# Altium PCB LacewingPXE_v3p1.PcbDoc (part 1 of 2)
Units mm, origin at the board's own origin, x right, y up, seen from the top; angles counter-clockwise.
Board outline 62.74 x 108.59 mm, 2 copper layers (Top Layer, Bottom Layer); 89 components, 71 nets, 448 pads, 65 vias.
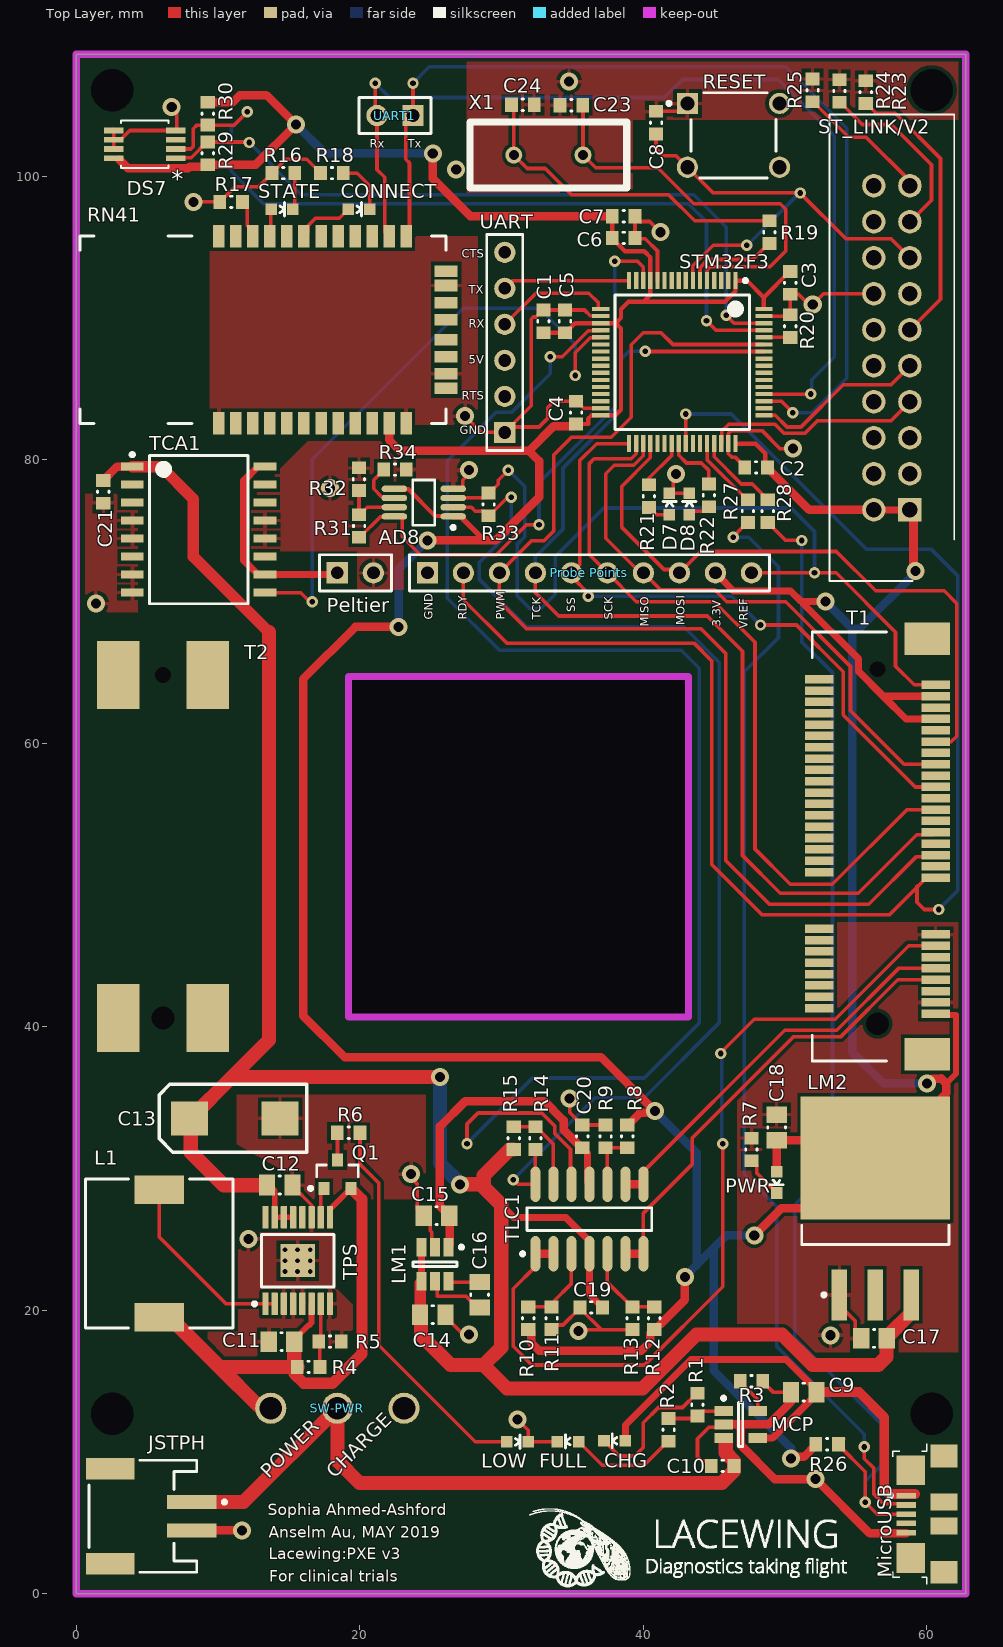
[diagram p0: Top Layer view]
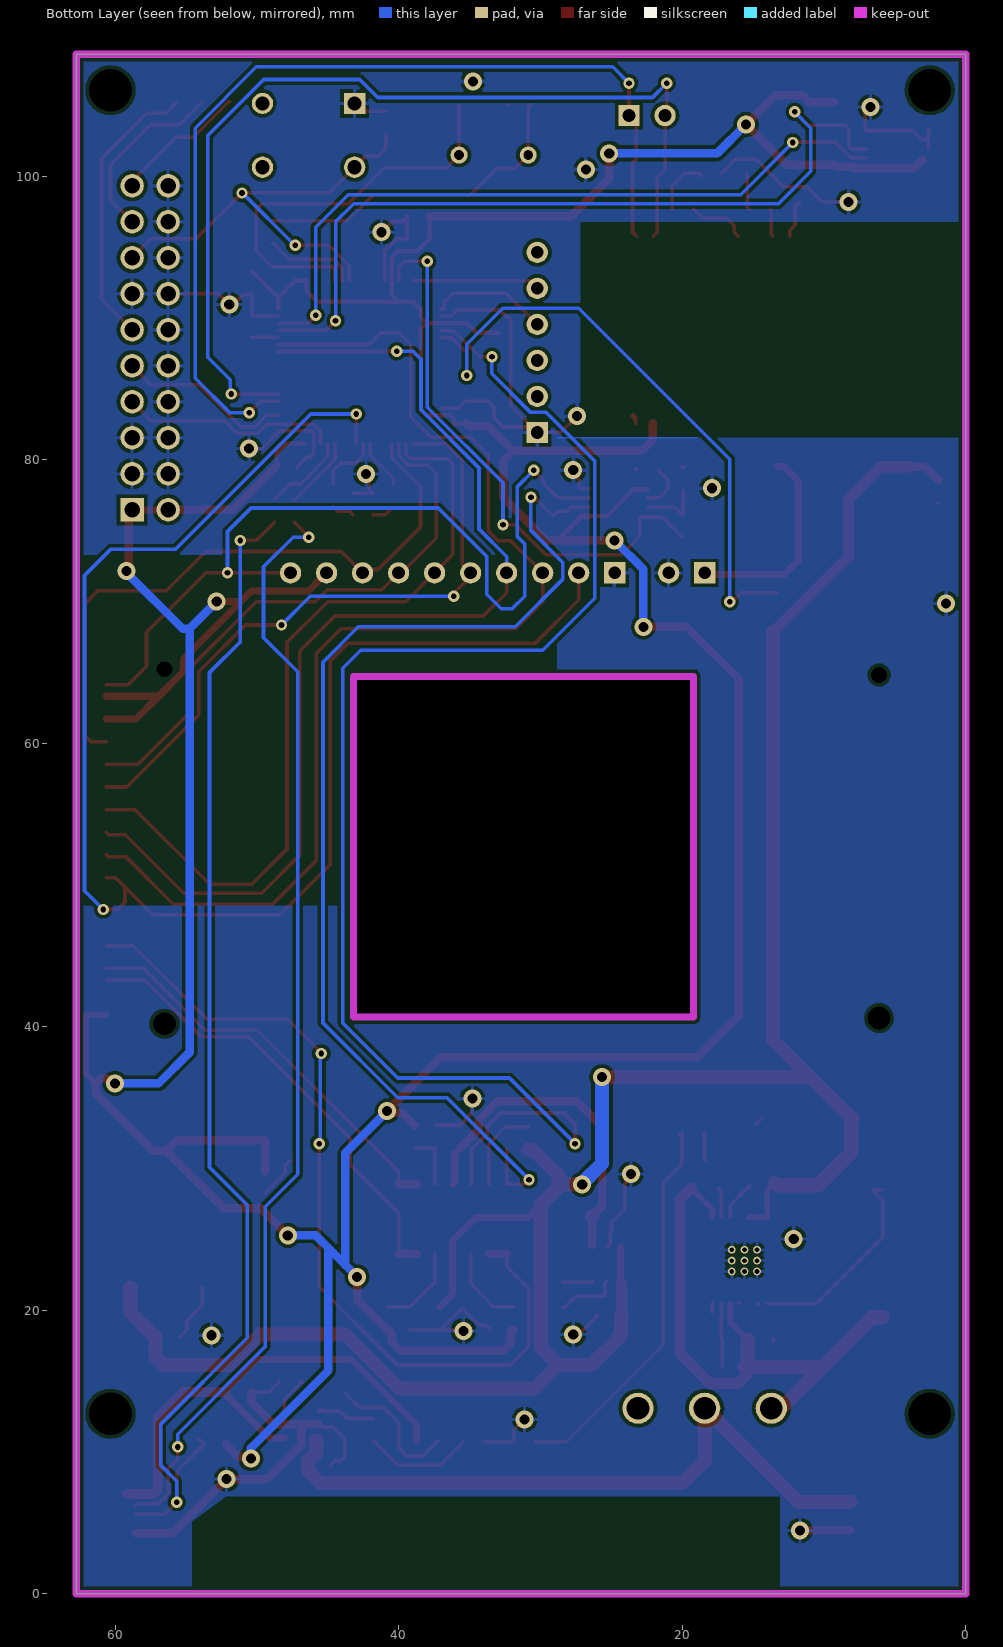
[diagram p1: Bottom Layer view, seen from below]

## Layer stack, top to bottom
Top Solder: solder mask 0.0102, Solder Resist, Dk 3.5
Top Layer: signal copper 0.0356
Dielectric 1: dielectric 0.32, FR-4, Dk 4.8
Bottom Layer: signal copper 0.0356
Bottom Solder: solder mask 0.0102, Solder Resist, Dk 3.5

## Board outline
0,0 62.738,0 62.738,108.585 0,108.585
cut-out: 43.188,40.672 19.188,40.672 19.188,64.705 43.188,64.705

## Design rules (kind name [scope] priority, off if disabled: settings)
Clearance [All] p1: gap=0.254 ignorepadtopadclearanceinfootprint=TRUE except(0: Arc-Hole Track-Hole SMDPad-Hole THPad-Hole Via-Hole Fill-Hole Poly-Hole Region-Hole Text-Hole; 0.2: Arc-Arc Arc-Track Arc-SMDPad Track-Track Track-SMDPad)
ComponentClearance [All] p1 off: gap=0.254 collisioncheckmode=3 verticalgap=0.254 showdistances=FALSE
HoleSize [All] p1: absolutevalues=TRUE maxlimit=3 minlimit=0.025 maxpercent=80.000 minpercent=20.000
MinimumSolderMaskSliver [All] p1: minsoldermaskwidth=0.1
PolygonConnect [All] p1: connectstyle=Relief reliefconductorwidth=0.254 reliefentries=4 polygonreliefangle="90 Angle" airgapwidth=0.254
RoutingVias [All] p1: holewidth=0.711 width=1.27 viastyle="Through Hole" minholewidth=0.4 minwidth=0.8 maxholewidth=0.711 maxwidth=1.27
SilkToSilkClearance [All] p1: silktosilkclearance=0.1
SilkToSolderMaskClearance [IsPad] p1: minsilkscreentomaskgap=0.1 clearancetoexposedcopper=TRUE
SolderMaskExpansion [All] p1: expansion=0.102
Width Width_+5VDD [InNet('+5VDD')] p1: maxlimit=1 minlimit=0.4 preferedwidth=1 minimp=50.000000 maximp=50.000000 favimp=50.000000
Width Width_-5VDD [InNet('-5VDD')] p2: maxlimit=1 minlimit=0.5 preferedwidth=1 minimp=50.000000 maximp=50.000000 favimp=50.000000
Width Width_VLi [InNet('VLiPo')] p3: maxlimit=1 minlimit=0.5 preferedwidth=1 minimp=50.000000 maximp=50.000000 favimp=50.000000
Width Width_VPelt [InNet('Vpeltier')] p4: maxlimit=1 minlimit=0.5 preferedwidth=1 minimp=50.000000 maximp=50.000000 favimp=50.000000
Width Width_5VUSB [InNet('5VUSB')] p5: maxlimit=1 minlimit=0.5 preferedwidth=1 minimp=50.000000 maximp=50.000000 favimp=50.000000
Width Width_VBat [InNet('VBAT')] p6: maxlimit=1 minlimit=0.4 preferedwidth=1 minimp=50.000000 maximp=50.000000 favimp=50.000000
Width Width_3VDD [InNet('3.3VDD')] p7: maxlimit=0.6 minlimit=0.254 preferedwidth=0.6 minimp=50.000000 maximp=50.000000 favimp=50.000000
Width [All] p8: maxlimit=0.6 minlimit=0.254 preferedwidth=0.254 minimp=50.000000 maximp=50.000000 favimp=50.000000
25 further rules are at their usual default settings.

## Components (designator, comment, footprint, x,y, rotation, side; value= is the part's Value field where it differs from the comment)
AD8 "AD8237" ADI-RM-8_N 24.511,76.962 r180 top (schematic designator U3)
C1 "4.7uF" CAPC0603(1608)100_N 32.948,89.751 r90 top
C2 "100nF" CAPC0603(1608)100_N 47.95,79.442 r180 top
C3 "100nF" CAPC0603(1608)100_N 50.363,92.456 r270 top
C4 "100nF" CAPC0603(1608)100_N 35.25,83.312 r90 top
C5 "100nF" CAPC0603(1608)100_N 34.472,89.751 r90 top
C6 "1uF" CAPC0603(1608)100_N 38.608,95.631 r0 top
C7 "10nF" CAPC0603(1608)100_N 38.608,97.163 r0 top
C8 "100nF" CAPC0603(1608)100_N 40.894,103.759 r90 top
C9 "10µF" CAPC0805(2012)75_N 51.308,14.224 r0 top
C10 "4.7µF" CAPC0603(1608)100_N 45.593,9.017 r0 top
C11 "10µF" CAPC0805(2012)75_N 14.478,17.78 r0 top
C12 "2.2µF" CAPC0805(2012)75_N 14.351,28.829 r180 top
C13 "220µF" AVX-CAPC7343_V 11.176,33.528 r0 top
C14 "2.2µF" CAPC0805(2012)75_N 25.146,19.685 r180 top
C15 "10µF" CAPC0805(2012)75_N 25.411,26.67 r180 top
C16 "10µF" CAPC0805(2012)75_N 28.448,21.082 r90 top
C17 "10µF" CAPC0805(2012)75_N 56.276,18.011 r180 top
C18 "10µF" CAPC0805(2012)75_N 49.403,32.893 r270 top
C19 "0.1µF" CAPC0603(1608)100_N 36.322,20.193 r0 top
C20 "0.1µF" CAPC0603(1608)100_N 35.687,32.258 r270 top
C21 "0.1µF" CAPC0603(1608)100_N 1.905,77.724 r90 top
C23 "18pF" CAPC0603(1608)100_N 34.925,104.991 r180 top
C24 "18pF" CAPC0603(1608)100_N 31.496,105.029 r0 top
CHG "Yellow" LED-0603 37.985,10.78 r90 top (schematic designator D1)
CONNECT "Green" LED-0603 19.939,97.663 r270 top (schematic designator D5)
D7 "Red" LED-0603 41.835,76.857 r0 top
D8 "Green" LED-0603 43.229,76.857 r0 top
DS7 "DS7505U+" 21-0036K 4.826,102.235 r180 top value=Value (schematic designator U2)
FULL "Green" LED-0603 34.683,10.726 r90 top (schematic designator D2)
JSTPH "Li-Poly battery" "JST- S2B-PH-SM4-TB(LF)(SN)-2_V" 4.699,5.461 r270 top
L1 "15µH" "WE-PD 1050" 5.842,24.003 r90 top
LM1 "LM2776 Switched-capacitor inverter" TI-DBV6_M 25.31,23.241 r270 top
LM2 "LM1086IS-3.3, 3.3V voltage regulator" TS3B_M 56.368,27.184 r90 top
LOW "Red" LED-0603 31.115,10.726 r270 top (schematic designator D3)
MCP "MCP73831T-2ACI/OT Li-Poly battery charger" SOT-23-OT5_M 46.863,11.938 r0 top
MicroUSB "ZX62R-B-5P" HIRO-ZX62R-B-5P_V 59.876,5.611 r90 top (schematic designator MicroUSB-TypeB)
Peltier "Header 2" HDR1X2 18.415,72.009 r0 top
"Probe Points" "Header 10" HDR1X10 24.765,72.009 r0 top
PWR "Blue" LED-0603 49.403,29.027 r180 top (schematic designator D4)
Q1 "MMUN2133LT1G" ONSC-SOT-23-3-318-08_V 18.426,29.591 r90 top
R1 "1k" RESC0603(1608)_N 43.815,13.335 r270 top
R2 "1k" RESC0603(1608)_N 41.783,11.557 r90 top
R3 "2k" RESC0603(1608)_N 47.625,14.986 r0 top
R4 "2.7M" RESC0603(1608)_N 16.383,16.002 r180 top
R5 "470k" RESC0603(1608)_N 17.896,17.78 r0 top
R6 "1k5" RESC0603(1608)_N 19.215,32.512 r180 top
R7 "200" RESC0603(1608)_N 47.625,31.331 r90 top
R8 "75k" RESC0603(1608)_N 38.862,32.258 r270 top
R9 "24k" RESC0603(1608)_N 37.338,32.258 r90 top
R10 "51k" RESC0603(1608)_N 31.877,19.431 r90 top
R11 "30k" RESC0603(1608)_N 33.528,19.431 r270 top
R12 "51k" RESC0603(1608)_N 40.767,19.431 r90 top
R13 "51k" RESC0603(1608)_N 39.243,19.431 r270 top
R14 "20k" RESC0603(1608)_N 32.385,32.131 r90 top
R15 "20k" RESC0603(1608)_N 30.861,32.131 r270 top
R16 "470" RESC0603(1608)_N 14.605,100.203 r0 top
R17 "10k" RESC0603(1608)_N 10.922,98.171 r0 top
R18 "470" RESC0603(1608)_N 18.034,100.203 r0 top
R19 "0" RESC0603(1608)_N 48.895,96.035 r270 top
R20 "10k" RESC0603(1608)_N 50.363,89.408 r90 top
R21 "510" RESC0603(1608)_N 40.386,77.414 r90 top
R22 "510" RESC0603(1608)_N 44.623,77.474 r90 top
R23 "10k" RESC0603(1608)_N 55.686,105.918 r270 top
R24 "10k" RESC0603(1608)_N 53.828,105.997 r270 top
R25 "10k" RESC0603(1608)_N 51.931,106.046 r270 top
R26 "1.5k" RESC0603(1608)_N 52.959,10.541 r180 top
R27 "22" RESC0603(1608)_N 47.371,76.365 r90 top
R28 "22" RESC0603(1608)_N 48.768,76.365 r90 top
R29 "10k" RESC0603(1608)_N 9.271,101.6 r270 top
R30 "10k" RESC0603(1608)_N 9.271,104.394 r90 top
R31 "1M" RESC0603(1608)_N 19.95,75.311 r270 top
R32 "1k" RESC0603(1608)_N 19.939,78.613 r270 top
R33 "10k" RESC0603(1608)_N 29.083,76.835 r270 top
R34 "1k" RESC0603(1608)_N 22.479,79.294 r180 top
RESET "Tactile switch" OMRON-B3F-1000-4_V 46.355,102.87 r0 top (schematic designator SW-RST1)
RN41 "Bluetooth module w/ antenna" RN41 18.071,89.154 r0 top (schematic designator RN)
ST_LINK/V2 "JTAG Programmer" JTAG2 58.801,76.454 r90 top (schematic designator CN1)
STATE "Red" LED-0603 14.517,97.663 r270 top (schematic designator D6)
STM32F3 "STM32F303RET6" STM-LQFP64_V 42.743,86.868 r270 top (schematic designator U1)
SW-PWR "SW-SPDT" "SWITCH SPDT CS12ANW03" 18.414,13.081 r90 top
T1 "Mini PCIe connector" "Molex Conn-67910" 56.515,52.705 r90 top
T2 "Mini PCIe Latch" "Molex Latch-48099" 6.115,52.705 r90 top
TCA1 "TCA0372 Dual high power Op-amp" ONSC-SOIC-16-751G-03_V 8.636,75.057 r0 top
TLC1 "TLC2274 Quad Op-amp" TI-D14_M 36.195,26.427 r90 top
TPS "TPS61032 Boost SMPS controller" PW0016A_M 15.621,23.495 r90 top
UART "Header 6" HDR1X6 30.226,81.915 r90 top (schematic designator UART2)
UART1 "Header 2" HDR1X2 23.749,104.267 r180 top
X1 "8MHz" QCL 33.301,101.473 r180 top

## Footprints (in the part's own frame and the unit in brackets; to place one, negate y for a bottom-side part, rotate by r counter-clockwise, add the part's x,y. Pads: shape width x height; smd on the part's side, far side on the other; paste and mask are expansions set on the pad)
21-0036K [mil]
  rect 54x16 smd paste+0 mask+0: 1(-86,38.39) 2(-86,12.8) 3(-86,-12.8) 4(-86,-38.39) 5(86,-38.39) 6(86,-12.8) 7(86,12.8) 8(86,38.39)
  silkscreen extent -66,-66 66,66, body extent 0,0 10,10, height 10
ADI-RM-8_N [mm] "SOP, 8-Leads, Body 3x3mm, Pitch 0.65mm, IPC Medium Density"
  oval 1.8x0.45 smd: 1(-2.075,0.975) 2(-2.075,0.325) 3(-2.075,-0.325) 4(-2.075,-0.975) 5(2.075,-0.975) 6(2.075,-0.325) 7(2.075,0.325) 8(2.075,0.975)
  silkscreen extent -2.2,-1.6 0.77,1.87, body extent -1.6,-1.6 1.6,1.6, height 1.1
AVX-CAPC7343_V [mm] "SMT Capacitor, 2 Leads, Body 7.3x4.3mm"
  rect 2.6x2.4 smd: 1(-3.202,0.007) 2(3.198,0.007)
  silkscreen extent -5.33,-2.39 5.08,2.41, body extent -3.49,-2.03 3.51,2.04, height 4.05
CAPC0603(1608)100_N [mm] "Chip Capacitor, Body 1.6x0.8mm, Height 1.0mm, IPC Medium Density"
  rect 0.9x1 smd: 1(-0.8,0) 2(0.8,0)
  silkscreen extent -0.05,-0.4 0.05,0.4, body extent -0.87,-0.48 0.88,0.47, height 1
CAPC0805(2012)75_N [mm] "Chip Capacitor, Body 2.0x1.2mm, Height 0.75mm, IPC Medium Density"
  rect 1.15x1.45 smd: 1(-0.9,0) 2(0.9,0)
  silkscreen extent -0.05,-0.62 0.05,0.63, body extent -1.1,-0.72 1.1,0.73, height 0.75
HDR1X2 [mm] "Connector; Header; 2 Position"
  rect 1.5x1.5 hole 0.9: 1(0,0)
  round 1.5 hole 0.9: 2(2.54,0)
  silkscreen extent -1.27,-1.27 3.81,1.27
HDR1X6 [mm] "Connector; Header; 6 Position"
  rect 1.5x1.5 hole 0.9: 1(0,0)
  round 1.5 hole 0.9: 2(2.54,0) 3(5.08,0) 4(7.62,0) 5(10.16,0) 6(12.7,0)
  silkscreen extent -1.27,-1.27 13.97,1.27
HDR1X10 [mm] "Connector; Header; 10 Position"
  rect 1.5x1.5 hole 0.9: 1(0,0)
  round 1.5 hole 0.9: 2(2.54,0) 3(5.08,0) 4(7.62,0) 5(10.16,0) 6(12.7,0) 7(15.24,0) 8(17.78,0) 9(20.32,0) 10(22.86,0)
  silkscreen extent -1.27,-1.27 24.13,1.27
HIRO-ZX62R-B-5P_V [mm] "USB Micro-B R/A Connector"
  rect 0.4x1.35 smd: 1(1.3,1.338) 2(0.65,1.338) 3(0,1.338) 4(-0.65,1.338) 5(-1.3,1.338)
  rect 2.1x2 smd: 6(-3.1,1.012) 11(3.1,1.012)
  rect 1.6x1.9 smd: 7(-4.1,-1.338) 10(4.1,-1.338)
  rect 1.2x1.9 smd: 8(-0.85,-1.338) 9(0.85,-1.338)
  silkscreen extent -4.95,-0.13 4.95,2.58, body extent -4.4,-3.95 4.4,1.78, height 2.71
"JST- S2B-PH-SM4-TB(LF)(SN)-2_V" [mm] "SMD, 2-Leads, Body 7.9x7.6mm, Pitch 2mm"
  rect 1x3.5 smd: 1(-1,3.45) 2(1,3.45)
  rect 1.5x3.4 smd: MP1(-3.35,-2.3) MP2(3.35,-2.3)
  silkscreen extent -3.95,-3.8 3.95,5.88, body extent -3.95,-3.8 3.95,4.8, height 5.6
JTAG2 [mm] "Header, Vertical Shrouded, 100 mil pitch; 25 mil lead width, 20 pins, 2 rows, 10 pins per row, 1295 mil L X 346 mil W X 346 mil H body"
  rect 1.652x1.652 hole 1.101 paste-1.652: 1(0,0)
  round 1.652 hole 1.101 paste-1.652: 2(0,2.54) 3(2.54,0) 4(2.54,2.54) 5(5.08,0) 6(5.08,2.54) 7(7.62,0) 8(7.62,2.54) 9(10.16,0) 10(10.16,2.54) 11(12.7,0) 12(12.7,2.54) 13(15.24,0) 14(15.24,2.54) 15(17.78,0) 16(17.78,2.54) 17(20.32,0) 18(20.32,2.54) 19(22.86,0) 20(22.86,2.54)
  silkscreen extent -5.02,-3.12 27.88,5.66, body extent -3.18,-3.56 26.04,5.92, height 8.89
LED-0603 [mil] "LED-0603"
  rect 32x32 smd: A(0,-29.53) C(0,30)
  silkscreen extent -18,-6 19,7
"Molex Conn-67910" [mm] "Board-to-Board Connector, SMT, Right Angle, Pitch 0.8mm, 52-Position, Female"
  rect 0.6x2 smd: 1(-11.8,-4.1) 2(-11.4,4.1) 3(-11,-4.1) 4(-10.6,4.1) 5(-10.2,-4.1) 6(-9.8,4.1) 7(-9.4,-4.1) 8(-9,4.1) 9(-8.6,-4.1) 10(-8.2,4.1) 11(-7.8,-4.1) 12(-7.4,4.1) 13(-7,-4.1) 14(-6.6,4.1) 15(-6.2,-4.1) 16(-5.8,4.1) 17(-2.2,-4.1) 18(-1.8,4.1) 19(-1.4,-4.1) 20(-1,4.1) 21(-0.6,-4.1) 22(-0.2,4.1) 23(0.2,-4.1) 24(0.6,4.1) 25(1,-4.1) 26(1.4,4.1) 27(1.8,-4.1) 28(2.2,4.1) 29(2.6,-4.1) 30(3,4.1) 31(3.4,-4.1) 32(3.8,4.1) 33(4.2,-4.1) 34(4.6,4.1) 35(5,-4.1) 36(5.4,4.1) 37(5.8,-4.1) 38(6.2,4.1) 39(6.6,-4.1) 40(7,4.1) 41(7.4,-4.1) 42(7.8,4.1) 43(8.2,-4.1) 44(8.6,4.1) 45(9,-4.1) 46(9.4,4.1) 47(9.8,-4.1) 48(10.2,4.1) 49(10.6,-4.1) 50(11,4.1) 51(11.4,-4.1) 52(11.8,4.1)
  round 1.3 hole 1.6 unplated: MH1(-12.5,0)
  round 0.8 hole 1.1 unplated: MH2(12.5,0)
  rect 2.3x3.2 smd: MP1C(-14.65,-3.5) MP2C(14.65,-3.5)
  silkscreen extent -15.12,-0.64 15.12,4.6, body extent -15,-5 15,4.5, height 5.6
"Molex Latch-48099" [mm]
  round 1.3 hole 1.6 unplated: MH3(-12.1,0)
  round 0.8 hole 1.1 unplated: MH4(12.1,0)
  rect 4.8x3 smd: MP1L(-12.1,3.15) MP2L(-12.1,-3.15) MP3L(12.1,3.15) MP4L(12.1,-3.15)
OMRON-B3F-1000-4_V [mm] "TH, 4-Leads, Body 6x6mm"
  rect 1.5x1.5 hole 1 paste+0: 1(-3.25,2.25)
  round 1.5 hole 1 paste+0: 2(3.25,2.25) 3(-3.25,-2.25) 4(3.25,-2.25)
  silkscreen extent -4.67,-3 3,3, body extent -3,-3 3,3, height 4.5
ONSC-SOIC-16-751G-03_V [mm] "SOIC, 16-Leads, Body 10.45x7.6mm, Pitch 1.27mm"
  rect 1.62x0.58 smd: 1(-4.69,4.445) 2(-4.69,3.175) 3(-4.69,1.905) 4(-4.69,0.635) 5(-4.69,-0.635) 6(-4.69,-1.905) 7(-4.69,-3.175) 8(-4.69,-4.445) 9(4.69,-4.445) 10(4.69,-3.175) 11(4.69,-1.905) 12(4.69,-0.635) 13(4.69,0.635) 14(4.69,1.905) 15(4.69,3.175) 16(4.69,4.445)
  silkscreen extent -4.81,-5.23 3.48,5.41, body extent -3.8,-5.23 3.8,5.23, height 2.65
ONSC-SOT-23-3-318-08_V [mm] "SOT23, 3-Leads, Body 2.92x1.3mm, Pitch 0.95mm"
  rect 0.9x0.8 smd: 1(-1,0.95) 2(-1,-0.95) 3(1,0)
  silkscreen extent -1.12,-1.46 0.65,2.02, body extent -0.65,-1.46 0.65,1.46, height 1.11
PW0016A_M [mm] "SOP, 16-Leads, Body 5.1x4.5mm, Pitch 0.65mm, IPC Low Density"
  rrect22% 1.6x0.45 smd: 1(-3.05,2.275) 2(-3.05,1.625) 3(-3.05,0.975) 4(-3.05,0.325) 5(-3.05,-0.325) 6(-3.05,-0.975) 7(-3.05,-1.625) 8(-3.05,-2.275) 9(3.05,-2.275) 10(3.05,-1.625) 11(3.05,-0.975) 12(3.05,-0.325) 13(3.05,0.325) 14(3.05,0.975) 15(3.05,1.625) 16(3.05,2.275)
  rect 2.31x2.46 smd: PowerPAD(0,0)
  silkscreen extent -3.17,-2.55 1.85,3.17, body extent -3.21,-2.5 3.21,2.5, height 1
QCL [mm]
  round 1.2 hole 0.7: 1(-2.44,0) 2(2.44,0)
  silkscreen extent -5.53,-2.32 5.53,2.32
RESC0603(1608)_N [mm] "Chip Resistor, Body 1.6x0.8mm, IPC Medium Density"
  rect 0.9x1 smd: 1(-0.8,0) 2(0.8,0)
  silkscreen extent -0.05,-0.4 0.05,0.4, body extent -0.85,-0.47 0.85,0.47, height 0.6
RN41 [mil]
  rect 32x63 smd: 1(-315.42,-259.92) 2(-268.18,-259.92) 3(-220.93,-259.92) 4(-173.69,-259.92) 5(-126.44,-259.92) 6(-79.2,-259.92) 7(-31.58,-259.92) 8(15.42,-259.92) 9(63.42,-259.92) 10(110.42,-259.92) 11(157.42,-259.92) 12(204.42,-259.92) 13(204.42,259.92) 14(157.42,259.92) 15(110.42,259.92) 16(63.42,259.92) 17(15.42,259.92) 18(-31.58,259.92) 19(-79.2,259.92) 20(-126.44,259.92) 21(-173.69,259.92) 22(-220.93,259.92) 23(-268.18,259.92) 24(-315.42,259.92)
  rect 63x32 smd: 28(315.42,122.92) 29(315.42,-122.13) 30(315.42,162.92) 31(315.42,74.92) 32(315.42,27.92) 33(315.42,-27.64) 34(315.42,-74.88) 35(315.42,-162.37)
  silkscreen extent -701,-260 315,260
SOT-23-OT5_M [mm] "SOT23, 5-Leads, Body 2.9x1.7mm, Pitch 0.95mm, Lead Span 2.8mm, IPC Low Density"
  rect 1.3x0.7 smd: 1(-1.2,0.95) 2(-1.2,0) 3(-1.2,-0.95) 4(1.2,-0.95) 5(1.2,0.95)
  silkscreen extent -1.32,-1.55 0.15,1.97, body extent -0.9,-1.55 0.9,1.55, height 1.45
STM-LQFP64_V [mm] "Thin QFP, 64-Leads, Body 10x10mm, Pitch 0.5mm, ST Recommended"
  rect 1.2x0.3 smd: 1(-5.75,3.75) 2(-5.75,3.25) 3(-5.75,2.75) 4(-5.75,2.25) 5(-5.75,1.75) 6(-5.75,1.25) 7(-5.75,0.75) 8(-5.75,0.25) 9(-5.75,-0.25) 10(-5.75,-0.75) 11(-5.75,-1.25) 12(-5.75,-1.75) 13(-5.75,-2.25) 14(-5.75,-2.75) 15(-5.75,-3.25) 16(-5.75,-3.75) 33(5.75,-3.75) 34(5.75,-3.25) 35(5.75,-2.75) 36(5.75,-2.25) 37(5.75,-1.75) 38(5.75,-1.25) 39(5.75,-0.75) 40(5.75,-0.25) 41(5.75,0.25) 42(5.75,0.75) 43(5.75,1.25) 44(5.75,1.75) 45(5.75,2.25) 46(5.75,2.75) 47(5.75,3.25) 48(5.75,3.75)
  rect 0.3x1.2 smd: 17(-3.75,-5.75) 18(-3.25,-5.75) 19(-2.75,-5.75) 20(-2.25,-5.75) 21(-1.75,-5.75) 22(-1.25,-5.75) 23(-0.75,-5.75) 24(-0.25,-5.75) 25(0.25,-5.75) 26(0.75,-5.75) 27(1.25,-5.75) 28(1.75,-5.75) 29(2.25,-5.75) 30(2.75,-5.75) 31(3.25,-5.75) 32(3.75,-5.75) 49(3.75,5.75) 50(3.25,5.75) 51(2.75,5.75) 52(2.25,5.75) 53(1.75,5.75) 54(1.25,5.75) 55(0.75,5.75) 56(0.25,5.75) 57(-0.25,5.75) 58(-0.75,5.75) 59(-1.25,5.75) 60(-1.75,5.75) 61(-2.25,5.75) 62(-2.75,5.75) 63(-3.25,5.75) 64(-3.75,5.75)
  silkscreen extent -5.87,-4.75 4.75,4.75, body extent -5,-5 5,5, height 1.6
"SWITCH SPDT CS12ANW03" [mm]
  round 2.2 hole 1.6: 1(0,-4.7) 2(0,0) 3(0,4.7)
TI-D14_M [mm] "SOIC, 14-Leads, Body 8.65x3.9mm, Pitch 1.27mm, IPC Low Density"
  oval 2.5x0.7 smd: 1(-2.45,3.81) 2(-2.45,2.54) 3(-2.45,1.27) 4(-2.45,0) 5(-2.45,-1.27) 6(-2.45,-2.54) 7(-2.45,-3.81) 8(2.45,-3.81) 9(2.45,-2.54) 10(2.45,-1.27) 11(2.45,0) 12(2.45,1.27) 13(2.45,2.54) 14(2.45,3.81)
  silkscreen extent -2.57,-4.4 0.8,4.83, body extent -2,-4.38 2,4.38, height 1.75
TI-DBV6_M [mm] "SOT-23, 6-Leads, Body 2.90x1.60mm, Pitch 0.95mm, IPC Low Density"
  rect 1.3x0.7 smd: 1(-1.2,0.95) 2(-1.2,0) 3(-1.2,-0.95) 4(1.2,-0.95) 5(1.2,0) 6(1.2,0.95)
  silkscreen extent -1.32,-1.55 0.15,1.98, body extent -0.87,-1.52 0.87,1.53, height 1.45
TS3B_M [mm] "D2-PAK, 4-Leads, Body 8.6x10.2mm, Pitch 2.54mm, Lead Span 14.2mm, IPC Low Density"
  rect 3.6x1.1 smd: 1(-6.1,2.54) 2(-6.1,0) 3(-6.1,-2.54)
  rect 8.7x10.55 smd: TAB(3.55,0)
  silkscreen extent -6.22,-5.2 -1.2,5.2, body extent -2.55,-5.2 6.34,5.2, height 4.64
"WE-PD 1050" [mm] "SMD Inductor, 2-Leads, Body 10,0x10,0mm"
  rect 2x3.5 smd: 1(-4.5,0) 2(4.5,0)
  silkscreen extent -5.25,-5.2 5.25,5.2, body extent -5,-5 5,5, height 4.75

## Part data
C1 C2 C3 C4 C5 C6 C7 C8 C23 C24: library part CMP-1035-00032-1, "Ceramic CAP0603 (1608 Metric) Thickness 1mm SMD", Case-EIA=0603, Farnell Order=1759122
C9 C11 C12 C14 C15 C16 C17 C18: library part CMP-1036-00002-1, "Ceramic CAP0805 (2012 Metric) Thickness 0.75mm SMD", Case-EIA=0805, Rated Voltage="10 V"
  C9 C11 C15 C16 C17 C18: Farnell Order=2533951
  C12 C14: Farnell Order=2320829
C10: library part CMP-1035-00032-1, "Ceramic CAP0603 (1608 Metric) Thickness 1mm SMD", Case-EIA=0603, Rated Voltage="10 V", Farnell Order=2320818
C13: library part CMP-0279-00002-1, "Capacitor, Tantalum, 220uF 10% 10V MCCT-D (7343-31)", Manufacturer=AVX, PartNumber=TAJD227K010R, Rated Voltage=10V, Tolerance=10%, Farnell Order=2333072, PackageDescription="2-Pin SMT Capacitor, 7.3 x 4.3 mm Body", Polarity=Polarized, Technology=Tantalum
C19 C20 C21: library part CAP, "Ceramic CAP0603 (1608 Metric) Thickness 1mm SMD", Case-EIA=0603, Farnell Order=1759122
CHG CONNECT D7 D8 FULL LOW PWR STATE: library part LED0603, "LED SMD 0603"
  CHG: Farnell Order=2335795
  CONNECT FULL: Farnell Order=2099223
  D7 D8 PWR: RS Order=654-5666
  LOW STATE: Farnell Order=2335810
DS7: library part ds7505u+, "No Description Available", Built_By=EMA_UL_Team, Copyright="Copyright (C) 2018 Accelerated Designs. All rights reserved", Manufacturer_Part_Number=ds7505u+, RefDes=RefDes, Type=DEV, Vendor="Maxim Integrated Products"
JSTPH: library part CN-1P-2M-R2, "JST PH 2-pin 2-holder SMD", Farnell Order=9492615
L1: library part CMP-1396-00032-1, "SMD-Shielded Power Inductor WE-PD 7447714150, L=15 μH", Farnell Order=2082678
LM1: library part LM2776, Farnell Order=2498456
LM2: library part LM1086IS-3.3, Farnell Order=9490647
MCP: library part CMP-0133-00143-1, "Miniature Single-Cell, Fully Integrated Li-Ion, Li-Polymer Charge Management Controller, 4.2V, 5-Pin SOT-23, Industrial Temperature, Tape and Reel", Farnell Order=1332158
MicroUSB: library part CMP-0031-00001-1, "Connector; USBMicro-B,Reverse type, SMT; 5 Position; Right Angle", Operating Temperature="-30 to 85 degC", ComponentLink1Description="Manufacturer URL", ComponentLink1URL=http://www.hirose.com/a€?, ComponentLink2Description=Datasheet, ComponentLink2URL=http://www.hirose.co.jp/cataloge_hp/e24200011.pdf, DatasheetVersion=08/2010, Mounting Technology="Surface Mount", PackageDescription="5-Pin USB Micro-B R/A Connector", PackageReference=ZX62R-B-5P, PartNumber=ZX62R-B-5P
Peltier UART1: "Header, 2-Pin", LatestRevisionDate=17-Jul-2002, LatestRevisionNote="Re-released for DXP Platform.", Publisher="Altium Limited"
"Probe Points": "Header, 10-Pin", LatestRevisionDate=17-Jul-2002, LatestRevisionNote="Re-released for DXP Platform.", Publisher="Altium Limited"
Q1: library part CMP-0630-00284-1, "Digital Transistor (BRT), R1=4.7 kOhm, R2=47 kOhm, PNP Transistor, 3-Pin SOT-23, Pb-Free, Tape and Reel", Farnell Order=2317628
R1 R2 R3 R4 R5 R6 R7 R8 R9 R10 R11 R12 R13 R14 R15 R16 R17 R18 R19 R20 R21 R22 R23 R24 R25 R26 R27 R28 R29 R30 R31 R32 R33 R34: library part CMP-1012-00514-1, "RES0603 (1608 Metric)  SMD", Case-EIA=0603
  R1 R16 R18: Farnell Order=2130829
  R2 R6 R29 R30 R31 R32 R33 R34: Farnell Order=2130855
  R3: Farnell Order=2130881
  R4: Farnell Order=2141592
  R5: Farnell Order=2131071
  R7 R19 R20 R21 R22 R23 R24 R25 R26 R27 R28: Farnell Order=2130797
  R8: Farnell Order=2350912
  R9: Farnell Order=2130969
  R10 R12 R13: Farnell Order=2350847
  R11: Farnell Order=2130976
  R14 R15: Farnell Order=2130962
  R17: Farnell Order=2130939
RESET: library part SW-SPST-4_A, "ORMON B3F-10XX", Mouser Order=653-B3F-1022
RN41: library part BLUETOOTH-RN41, "Bluetooth SMD module"
ST_LINK/V2: library part JTAG
STM32F3: library part STM32F303RBT6_1, "ARM Cortex-M4 32-bit MCU, 128 KB Flash, 32 KB Internal RAM, 52 I/Os, 64-pin LQFP, -40 to 85 degC, Tray", I/Os (High Current)=52, Operating Frequency(F) (Processor speed) (MHz)=72, PartNumber=STM32F303RBT6, Supplier Part Number 1=STM32F303RBT6-ND, Supply Voltage(Vcc) min (V)=2, ComponentLink1Description="Manufacturer URL", ComponentLink1URL=http://www.st.com/web/en/home.html, ComponentLink2Description=Datasheet, ComponentLink2URL=http://www.st.com/st-web-ui/static/active/en/resource/technical/document/datasheet/DM00058181.pdf, ComponentLink3Description="Package Specification", ComponentLink3URL=http://www.st.com/st-web-ui/static/active/en/resource/technical/document/datasheet/DM00037051.pdf, Core="ARM Cortex-M4", D/A Converter="2x12-bit (2 Channel)", DatasheetVersion="Rev. 6", FLASH Size (Prog) (kB)=128, Internal RAM Size (kB)=32, Mounting Technology="Surface Mount", PackageDescription="64-Pin Low Profile Quad Flat Package, 10 x 10 mm Body, 0.5 mm Pitch", PackageReference=LQFP64, PackageVersion="Rev. 4, 06/2013", Packing=Tray, Supplier 1=Digi-Key, Supplier 2=Farnell, Supplier 3=Newark, Supplier 4=Newark, Supplier 5=Mouser, Supplier Part Number 2=2333255, Supplier Part Number 3=99W9873, Supplier Part Number 4=66W7287, Supplier Part Number 5=511-STM32F303RBT6
SW-PWR: "Switch SPDT CS12ANW03", Mouser Order=633-CS12ANW03
TCA1: library part TCA0372, Farnell Order=1468783
TLC1: library part TLC2274, Farnell Order=2769370
TPS: library part TPS61032, Farnell Order=1207333
UART: "Header, 6-Pin", LatestRevisionDate=17-Jul-2002, LatestRevisionNote="Re-released for DXP Platform.", Publisher="Altium Limited"
X1: library part XTAL, "Crystal Oscillator", LatestRevisionDate=17-Jul-2002, LatestRevisionNote="Re-released for DXP Platform.", PackageDescription="Crystal, Thru-Hole; 2 Leads; Body 3.1 x 8.2 mm (Dia.xH)", PackageReference=R38, Published=8-Jun-2000, Publisher="Altium Limited"

## Free pads (board coordinates)
  round 1.524 hole 3 unplated: MH3(2.54,12.7) MH3(2.54,106.045) MH3(60.325,12.7) MH3(60.325,106.045)
  round 0.55 hole 0.33: P1(14.72,24.257) P2(16.498,24.257) P3(14.72,22.733) P4(16.498,22.733) P5(14.72,23.495) P5(15.609,22.733) P5(15.609,23.495) P5(15.609,24.257) P5(16.498,23.495)

## Via types
v1: diameter 1.27, hole 0.711, Top Layer to Bottom Layer, 34 vias
v2: diameter 0.8, hole 0.4, Top Layer to Bottom Layer, 31 vias

## Nets (pads, with @x,y where several pads share a name; then routed paths per layer and width w, separated by ;. In a path a pad name is that pad's centre, name@x,y a point inside that pad or via, vN(x,y) a via of type N, cw(c..) or ccw(c..) an arc to the next point about the centre after c; other vN are vias at no path point)
3.3VDD: "Probe Points.9" AD8.1 AD8.5 C1.1 C2.1 C3.1 C4.1 C5.1 C6.1 C7.1 C18.2 DS7.8 LM2.TAB PWR.A R8.1 R10.1 R12.1 R26.2 R29.2 R30.2 RN41.11 ST_LINK/V2.1 ST_LINK/V2.2 STM32F3.1 STM32F3.13 STM32F3.19 STM32F3.32 STM32F3.48 STM32F3.64 T1.1 T1.45 T1.49 | length 370.9
  Top Layer w0.254: AD8.5 AD8.5@22.474,77.899 ; AD8.1@26.548,76.025 AD8.1 ; C6.1@37.808,95.581 C6.1 ; STM32F3.13 40.488,92.623 STM32F3.13@40.493,92.628 ; C3.1@50.313,93.256 C3.1
  Top Layer w0.3: AD8.5@22.474,77.899 23.437,77.899 25.312,76.025 AD8.1@26.548,76.025 ; C1.1 C5.1 ; C5.1@34.522,88.951 35.189,89.618 STM32F3.19 38.047,89.618 ; C4.1 36.104,82.512 36.104,82.884 36.339,83.118 STM32F3.32 ; STM32F3.32@37.211,83.118 38.033,83.118 38.425,83.51 38.425,89.24 38.047,89.618 ; C6.1@37.808,95.581 38.701,94.688 40.067,94.688 40.493,94.262 STM32F3.13@40.493,92.628 ; C6.1 C7.1 ; STM32F3.13 40.493,91.618 40.005,91.13 ; 46.643,81.118 47.903,81.118 48.6,80.421 C2.1@48.6,79.592 ; STM32F3.64@48.493,90.626 48.493,91.436 ; C3.1@50.313,93.256 48.493,91.436 ; 38.047,89.618 38.425,89.996 38.425,90.604 38.951,91.13 40.005,91.13 ; 40.005,91.13 45.75,91.13 46.493,91.873 STM32F3.1 47.311,92.618 48.493,91.436
  Top Layer w0.4: AD8.1 27.111,75.987 28.806,74.292 ; T1.1 60.695,40.825 62.051,40.825 62.051,36.678 61.363,35.99
  Top Layer w0.5: 45.329,72.009 45.329,71.765 46.355,70.739 50.379,70.739 51.141,69.977 v1(52.832,69.977) ; 51.27,69.849 55.187,65.931 55.187,65.042 56.924,63.305 ; ST_LINK/V2.2 ST_LINK/V2.1 ; T1.45 58.524,61.705 56.924,63.305 ; T1.49 56.924,63.305
  Top Layer w0.6: DS7.8@3.027,101.163 3.634,100.557 7.903,100.557 7.996,100.65 9.121,100.65 R29.2 12.662,100.8 v1(15.494,103.632) 13.416,105.71 11.536,105.71 11.02,105.194 R30.2 ; RN41.11 22.069,81.386 22.845,80.611 31.929,80.611 ; v1(22.733,68.199) 19.685,68.199 16.002,64.516 16.002,40.767 18.923,37.846 37.007,37.846 v1(40.817,34.036) 40.689,33.908 39.762,33.908 38.912,33.058 R8.1 ; v1(24.765,74.292) 28.806,74.292 29.588,74.292 32.639,77.343 32.639,79.901 31.929,80.611 ; v1(25.146,101.6) 25.146,99.822 27.805,97.163 C7.1 ; R10.1 31.927,18.631 32.077,18.481 32.077,17.707 32.639,17.145 39.858,17.145 40.493,17.78 40.493,18.357 40.567,18.431 40.567,18.481 40.717,18.631 R12.1 40.817,18.631 41.467,19.281 41.474,19.281 42.926,20.733 v1(42.926,22.352) ; C4.1 35.2,82.512 35.05,82.362 33.68,82.362 31.929,80.611 ; 45.085,72.009 45.329,72.009 ; v1(47.821,25.273) 49.734,27.186 52.338,27.186 LM2.TAB@56.388,31.236 ; C2.1@48.6,79.592 C2.1 48.75,79.392 51.688,76.454 ST_LINK/V2.2 ; PWR.A C18.2 55.631,31.993 LM2.TAB@56.388,31.236 ; v1(50.419,9.525) 50.547,9.653 51.321,9.653 52.159,10.491 R26.2 ; ST_LINK/V2.1 59.054,76.201 59.054,72.264 v1(59.182,72.136) ; v1(60.015,35.99) 60.348,36.323 60.988,36.323 61.009,36.344 61.363,35.99 61.363,35.286 57.313,31.236 LM2.TAB@56.388,31.236
  Bottom Layer w0.6: v1(15.494,103.632) 17.526,101.6 v1(25.146,101.6) ; v1(22.733,68.199) 22.733,72.26 v1(24.765,74.292) ; v1(40.817,34.036) 43.752,31.101 43.752,23.177 ; v1(42.926,22.352) 43.752,23.177 ; v1(47.821,25.273) 45.847,25.273 44.958,24.384 ; v1(50.419,9.525) 50.419,10.287 44.958,15.748 44.958,24.384 ; v1(52.832,69.977) 54.737,68.072 ; v1(59.182,72.136) 59.182,72.009 55.245,68.072 54.737,68.072 ; v1(60.015,35.99) 56.943,35.99 54.737,38.197 54.737,68.072 ; 43.752,23.177 44.958,24.384
5VURT: UART.3
5VUSB: C9.2 CHG.A MCP.4 MicroUSB.1 | length 35.7
  Top Layer w0.5: CHG.A 38.735,11.888 43.357,16.51 50.072,16.51 C9.2@52.208,14.374 ; MCP.4 49.122,10.988 C9.2@52.208,14.074
  Top Layer w0.7: C9.2 55.198,14.224 56.991,12.43 56.991,7.36 57.313,7.038 MicroUSB.1@59.18,7.038
+5VDD: C12.2 C13.1 C14.2 C17.1 C19.2 C21.2 LM1.3 LM1.4 LM2.3 R15.2 TCA1.1 TLC1.4 TPS.13 TPS.14 TPS.15 | length 172.6
  Top Layer w0.4: C12.2@13.451,28.979 13.996,28.434 TPS.15 TPS.14 TPS.13
  Top Layer w0.5: LM1.4 LM1.3 ; 29.972,27.432 30.859,26.545 34.527,26.545 36.195,24.877 TLC1.4 36.195,21.12 C19.2
  Top Layer w0.6: C21.2 2.883,79.502 TCA1.1
  Top Layer w0.8: TCA1.1 5.969,79.502 8.255,77.216 8.255,73.152 13.589,67.818 ; C14.2@24.26,19.699 LM1.4@24.26,21.891
  Top Layer w1: C13.1 C13.1@8.074,33.535 ; C12.2@13.451,28.979 13.283,28.811 10.4,28.811 8.074,31.137 C13.1@8.074,33.535 ; 13.589,67.818 13.589,39.05 10.988,36.449 ; C14.2@24.26,19.699 C14.2 24.321,19.61 24.321,18.224 26.416,16.129 28.724,16.129 ; v1(25.654,36.449) 10.988,36.449 ; v1(27.051,28.877) 28.527,28.877 28.735,28.669 ; R15.2 30.569,31.331 28.735,29.497 28.735,28.669 ; C17.1 57.15,17.985 57.15,16.715 56.564,16.129 51.943,16.129 49.784,18.288 43.75,18.288 39.94,14.478 30.375,14.478 28.724,16.129 ; C17.1@57.197,18.011 57.197,18.182 57.251,18.236 57.31,18.236 58.908,19.834 LM2.3 ; LM2.3@58.878,21.536 58.928,21.586 LM2.3@58.928,20.336 ; C13.1@8.074,33.535 10.988,36.449 ; 28.724,16.129 29.972,17.377 29.972,27.432 28.735,28.669
  Bottom Layer w1: v1(25.654,36.449) 25.654,30.347 27.051,28.95 v1(27.051,28.877)
-5VDD: C15.1 C20.2 LM1.1 TLC1.11 | length 23.6
  Top Layer w0.5: C20.2@35.687,31.341 C20.2 ; C20.2@36.045,31.1 36.045,29.027 TLC1.11
  Top Layer w0.6: 25.654,32.955 25.654,27.327 C15.1 ; LM1.1@26.36,24.591 C15.1@26.36,26.621 ; 27.432,34.733 33.023,34.733 34.366,33.39 34.366,32.722 34.98,32.108 34.987,32.108 35.637,31.458 C20.2
  Top Layer w0.61: 25.654,32.955 27.432,34.733
  Top Layer w1: C15.1 C15.1@26.36,26.621
GND: "Probe Points.1" AD8.4 C1.2 C2.2 C3.2 C4.2 C5.2 C6.2 C7.2 C8.2 C9.1 C10.1 C11.1 C12.1 C13.2 C14.1 C15.2 C17.2 C18.1 C19.1 C20.1 C21.1 C23.2 C24.2 D7.C D8.C DS7.4 DS7.5 DS7.6 DS7.7 FULL.C JSTPH.2 LM1.2 LM2.1 LOW.C MCP.2 MicroUSB.5 pad.P1 pad.P2 pad.P3 pad.P4 pad.P5 Peltier.2 R3.2 R5.2 R7.2 R9.2 R11.2 R13.2 R16.1 R17.1 R18.1 R20.2 R23.1 R24.1 R25.1 R32.1 R34.1 RESET.1 RN41.1 RN41.12 RN41.28 RN41.29 ST_LINK/V2.3 ST_LINK/V2.4 ST_LINK/V2.5 ST_LINK/V2.6 ST_LINK/V2.8 ST_LINK/V2.10 ST_LINK/V2.12 ST_LINK/V2.13 ST_LINK/V2.14 ST_LINK/V2.16 ST_LINK/V2.18 ST_LINK/V2.20 STM32F3.12 STM32F3.18 STM32F3.31 STM32F3.47 STM32F3.63 T1.3 T1.15 TCA1.4 TCA1.5 TCA1.7 TCA1.8 TCA1.12 TCA1.13 TPS.3 TPS.4 TPS.5 TPS.8 TPS.11 TPS.PowerPAD UART.1 | length 145.4
  Top Layer w0.254: C21.1 C21.1@1.955,76.924 ; DS7.5@2.54,103.286 2.616,103.21 DS7.5 DS7.6 ; DS7.7 DS7.6 ; v1(6.731,104.864) 7.087,104.508 7.087,103.286 DS7.4 3.774,103.21 3.124,102.56 DS7.6 ; v1(8.255,98.171) R17.1 11.179,99.228 12.83,99.228 R16.1 14.779,101.177 16.26,101.177 R18.1 ; C11.1 C11.1@13.578,17.93 ; C13.2 C13.2@14.803,33.106 ; TPS.3@14.603,20.402 TPS.3 ; C12.1 15.251,28.754 16.599,27.406 16.599,26.548 TPS.11 TPS.11@16.599,26.542 ; TPS.5 TPS.5@16.044,20.543 ; TPS.8@17.798,20.543 TPS.8 TPS.8@17.896,19.87 ; R32.1@19.85,79.502 R32.1 R32.1@19.989,79.413 ; Peltier.2@20.592,72.009 Peltier.2 ; RN41.12 23.263,82.779 RN41.12@23.542,83.058 ; RN41.12@23.263,82.946 RN41.12@23.459,83.142 ; R34.1 R34.1@23.279,79.344 ; v1(23.622,29.591) 23.622,29.316 24.063,28.875 24.063,27.118 C15.2 24.959,26.222 24.959,25.6 25.087,25.472 25.087,24.664 LM1.2 ; C14.1 26.046,19.535 27.293,18.288 v1(27.686,18.288) ; AD8.4 27.165,77.937 27.256,78.028 27.256,78.543 27.686,78.973 v1(27.686,79.248) ; v1(27.432,83.058) 28.575,81.915 UART.1 ; v1(31.115,12.298) 31.877,11.536 LOW.C FULL.C ; C24.2 C24.2@32.334,104.991 ; R11.2 33.851,18.954 34.333,18.954 35.522,20.143 37.034,18.631 ; v1(34.798,34.925) 34.798,33.947 35.314,33.431 35.314,33.381 35.637,33.058 C20.1 R9.2 ; v1(35.433,18.542) 35.522,18.631 37.034,18.631 ; STM32F3.31 35.794,83.618 35.3,84.112 C4.2 33.693,84.112 33.274,83.693 33.274,82.931 32.639,82.296 30.861,82.296 30.353,81.788 UART.1 ; STM32F3.18 36.97,90.141 36.258,90.141 35.848,90.551 C5.2 C1.2 32.898,90.551 32.398,90.051 32.25,90.051 32.101,89.903 32.101,83.79 UART.1 ; R13.2 37.034,18.631 ; C7.2@39.408,97.213 C7.2 C7.2@39.408,97.113 ; C8.2 42.544,104.559 RESET.1 ; STM32F3.12 40.993,94.711 40.123,95.581 39.408,95.581 C6.2 C7.2@39.408,97.113 ; v1(41.202,96.035) 40.447,96.79 39.731,96.79 C7.2@39.408,97.113 ; v1(42.307,78.994) 42.114,78.802 42.114,77.898 D7.C 43.228,77.619 D8.C ; C10.1 44.793,9.067 44.47,9.39 44.077,9.39 43.815,9.652 43.815,10.922 44.632,11.739 45.464,11.739 MCP.2 ; C2.2 47.15,79.492 46.468,80.174 46.225,80.174 45.993,80.406 STM32F3.47 45.993,81.83 46.208,82.045 48.367,82.045 49.64,80.772 v1(50.546,80.772) ; R3.2 48.425,14.936 49.137,14.224 C9.1 ; STM32F3.63 R20.2@50.273,90.118 ; R20.2 C3.2 50.948,91.656 51.672,90.932 v1(51.947,90.932) 52.709,91.694 ST_LINK/V2.14 ; LM2.1@53.848,21.586 53.848,20.336 54.949,19.235 54.949,18.609 C17.2@55.397,18.161 ; ST_LINK/V2.8 ST_LINK/V2.8@56.57,84.074
  Top Layer w0.6: JSTPH.2@8.149,4.462 v1(11.683,4.462) ; MCP.2 46.609,11.938 ; C9.1 50.408,13.512 48.834,11.938 46.609,11.938 ; MicroUSB.5@58.539,4.261 55.952,4.261 v1(52.13,8.083) 49.261,8.083 46.863,10.481 46.863,11.684 46.609,11.938
  other v1: 53.213,18.23 12.133,25.019 1.397,69.85 17.896,77.978 26.798,100.452 34.76,106.68
I2C_SCL: DS7.2 R30.1 STM32F3.61 | length 57.8
  Top Layer w0.254: DS7.2 7.017,101.904 8.077,101.904 8.255,102.082 8.255,103.34 8.509,103.594 R30.1 11.138,103.594 v2(12.065,104.521) ; v2(44.45,89.789) 45.121,89.118 STM32F3.61
  Bottom Layer w0.254: v2(12.065,104.521) 10.922,103.378 10.922,100.33 13.208,98.044 43.173,98.044 44.45,96.767 v2(44.45,89.789)
I2C_SDA: DS7.1 R29.1 STM32F3.62 | length 50.9
  Top Layer w0.254: DS7.1 7.027,101.277 8.098,101.277 9.221,102.4 R29.1 12.154,102.4 v2(12.192,102.362) ; v2(45.847,90.17) 46.399,89.618 STM32F3.62
  Bottom Layer w0.254: v2(12.192,102.362) 15.875,98.679 43.561,98.679 45.847,96.393 v2(45.847,90.17)
IREF_ADC: AD8.8 R31.2 STM32F3.14 | length 40
  Top Layer w0.254: R31.2 20,74.511 21.438,75.949 22.931,75.949 22.984,75.896 22.984,74.558 24.266,73.276 29.619,73.276 31.753,75.41 v2(32.639,75.41) ; v2(37.973,93.98) 39.589,93.98 39.993,93.576 STM32F3.14
  Bottom Layer w0.254: v2(32.639,75.41) 32.639,78.359 37.973,83.693 v2(37.973,93.98)
NetAD8_6: AD8.6 R34.2 | length 3.4
  Top Layer w0.254: R34.2 21.679,79.244 20.987,78.552 20.987,77.93 21.532,77.385 21.61,77.385 21.708,77.287 AD8.6 AD8.6@22.398,77.325
NetAD8_7: AD8.7 R31.1 R32.2 | length 4.4
  Top Layer w0.254: R32.2 19.939,76.122 20.01,76.122 20.526,76.637 AD8.7
NetC16_1: C16.1 LM1.5 | length 4.4
  Top Layer w0.254: LM1.5 25.458,21.892 25.458,20.989 27.491,20.989 28.298,20.182 C16.1
NetC16_2: C16.2 LM1.6 | length 2.2
  Top Layer w0.254: LM1.6 26.319,21.982 C16.2
NetC23_1: C23.1 STM32F3.5 X1.1 | length 29.2
  Top Layer w0.254: C23.1 35.741,104.975 X1.1 36.63,100.584 41.021,100.584 43.561,98.044 49.657,98.044 50.038,97.663 50.038,94.704 48.933,93.599 44.699,93.599 44.493,93.393 STM32F3.5
NetC24_1: C24.1 R19.1 X1.2 | length 23.6
  Top Layer w0.254: C24.1 30.861,104.864 X1.2 31.804,100.53 33.082,100.53 34.933,98.679 41.771,98.679 43.615,96.835 R19.1
NetCHG_C: CHG.C R1.1 | length 9.9
  Top Layer w0.254: CHG.C 38.292,9.711 39.395,9.711 39.993,10.309 39.993,12.065 41.062,13.134 42.764,13.134 43.765,14.135 R1.1
NetCONNECT_A: CONNECT.A RN41.19 | length 4.2
  Top Layer w0.254: RN41.19 16.338,96.035 16.338,96.495 16.868,97.024 18.55,97.024 CONNECT.A
NetCONNECT_C: CONNECT.C R18.2 | length 4.1
  Top Layer w0.254: R18.2@18.669,100.038 R18.2 19.814,100.203 20.701,99.316 CONNECT.C
NetD7_A: D7.A R21.1 | length 1.7
  Top Layer w0.254: R21.1 40.436,76.614 40.943,76.107 D7.A
NetD8_A: D8.A R22.1 | length 1.6
  Top Layer w0.254: D8.A 43.472,76.351 44.3,76.351 R22.1
NetFULL_A: FULL.A R2.1 | length 7.7
  Top Layer w0.254: FULL.A 37.092,9.067 40.043,9.067 41.733,10.757 R2.1
NetL1_2: L1.2 TPS.1 TPS.2 | length 14.5
  Top Layer w0.254: L1.2 6.592,28.503 6.217,28.128 5.842,27.753 5.842,25.162 10.559,20.445 TPS.1 TPS.2
NetLOW_A: LOW.A R6.1 | length 27.6
  Top Layer w0.254: R6.1@20.154,32.373 R6.1 20.015,30.293 21.336,28.972 21.336,17.526 28.136,10.726 LOW.A
NetMCP_1: MCP.1 R1.2 R2.2 | length 4.3
  Top Layer w0.254: R2.2 43.637,12.357 R1.2 44.138,12.858 45.633,12.858 MCP.1 MCP.1@45.491,13.06
NetMCP_5: MCP.5 R3.1 | length 2.6
  Top Layer w0.254: R3.1 46.825,14.936 48.063,13.698 MCP.5
NetPWR_C: PWR.C R7.1 | length 3
  Top Layer w0.254: R7.1 47.675,30.531 47.998,30.208 47.998,29.67 PWR.C
NetQ1_1: Q1.1 TPS.10 | length 2.1
  Top Layer w0.254: TPS.10 17.246,28.361 Q1.1
NetQ1_3: Q1.3 R6.2 | length 1.9
  Top Layer w0.254: R6.2 18.426,32.501 Q1.3
NetR4_1: R4.1 R5.1 TPS.7 | length 4.5
  Top Layer w0.254: R4.1 17.183,17.693 R5.1 17.246,17.93 TPS.7
NetR14_2: R14.2 R15.1 TLC1.13 | length 6.1
  Top Layer w0.254: R15.1 R14.2 32.435,32.931 33.655,31.711 TLC1.13
NetR16_2: R16.2 STATE.C | length 2.6
  Top Layer w0.254: STATE.C 15.405,97.789 R16.2
NetR17_2: R17.2 RN41.22 | length 2.7
  Top Layer w0.254: R17.2 12.045,97.848 12.045,96.527 12.422,96.15 RN41.22@12.422,95.756
NetR19_2: R19.2 STM32F3.6 | length 6.5
  Top Layer w0.254: STM32F3.6 43.993,93.535 44.565,94.107 47.717,94.107 48.845,95.235 R19.2
NetR20_1: R20.1 STM32F3.60 | length 1.9
  Top Layer w0.254: STM32F3.60 50.353,88.618 R20.1
NetR21_2: R21.2 STM32F3.39 | length 3.6
  Top Layer w0.254: R21.2 40.386,78.681 41.993,80.288 STM32F3.39
NetR22_2: R22.2 STM32F3.40 | length 4.3
  Top Layer w0.254: STM32F3.40 42.493,80.299 43.036,79.756 44.088,79.756 44.623,79.221 R22.2
NetR23_2: R23.2 ST_LINK/V2.11 | length 19.9
  Top Layer w0.254: R23.2 55.736,105.118 56.422,104.432 57.765,104.432 60.96,101.237 60.96,91.313 ST_LINK/V2.11
NetR24_2: R24.2 ST_LINK/V2.17 | length 13
  Top Layer w0.254: R24.2 53.878,105.197 55.443,103.632 57.492,103.632 60.325,100.799 60.325,98.298 ST_LINK/V2.17
NetR25_2: R25.2 ST_LINK/V2.19 | length 9.5
  Top Layer w0.254: R25.2 51.981,105.246 54.484,102.743 55.7,102.743 58.801,99.642 ST_LINK/V2.19
NetR27_2: R27.2 STM32F3.44 | length 5.2
  Top Layer w0.254: STM32F3.44 44.493,79.993 47.321,77.165 R27.2 R27.2@47.421,77.165
NetR28_2: R28.2 STM32F3.45 | length 6
  Top Layer w0.254: STM32F3.45 44.993,80.186 46.901,78.278 47.67,78.278 48.768,77.18 R28.2
NetRN41_21: RN41.21 STATE.A | length 2
  Top Layer w0.254: RN41.21@13.622,95.756 13.728,95.862 13.728,97.624 STATE.A
NRST: C8.1 RESET.3 ST_LINK/V2.15 STM32F3.7 | length 32.9
  Top Layer w0.254: C8.1 40.894,101.956 41.43,101.42 42.305,101.42 RESET.3 44.919,98.806 v2(51.054,98.806) 54.293,95.567 57.468,95.567 ST_LINK/V2.15 ; STM32F3.7 43.493,93.677 44.939,95.123 v2(47.296,95.123)
  Bottom Layer w0.254: v2(47.296,95.123) 47.333,95.123 51.016,98.806 v2(51.054,98.806)
SPI_MISO: "Probe Points.7" STM32F3.35 T1.37 | length 40.3
  Top Layer w0.254: STM32F3.35 39.993,80.263 39.329,79.6 37.944,79.6 37.338,78.994 37.338,74.444 39.773,72.009 40.005,72.009 41.202,70.812 45.042,70.812 45.877,69.977 50.038,69.977 54.61,65.405 54.61,62.285 58.39,58.505 T1.37
SPI_MOSI: "Probe Points.8" STM32F3.36 T1.41 | length 44.8
  Top Layer w0.254: STM32F3.36 40.493,80.121 38.462,78.09 38.462,75.247 41.461,72.247 42.307,72.247 42.545,72.009 44.05,73.514 53.613,73.514 56.388,70.739 61.214,70.739 62.103,69.85 62.103,60.484 61.724,60.105 T1.41
SPI_SCK: "Probe Points.6" STM32F3.34 T1.29 | length 55.5
  Top Layer w0.254: STM32F3.34 39.493,80.406 39.141,80.054 36.524,80.054 36.195,79.725 36.195,73.279 37.465,72.009 39.497,69.977 45.003,69.977 47.875,67.105 47.875,52.524 50.361,50.038 53.323,50.038 58.59,55.305 T1.29
SPI_SS: "Probe Points.5" STM32F3.33 T1.33 | length 46.1
  Top Layer w0.254: v2(36.104,70.358) 36.104,70.576 34.925,71.755 34.925,72.009 35.514,72.598 35.514,79.93 36.702,81.118 STM32F3.33 ; v2(48.26,68.326) 50.8,68.326 54.098,65.028 54.098,61.985 59.178,56.905 T1.33
  Bottom Layer w0.254: v2(36.104,70.358) 46.228,70.358 v2(48.26,68.326)
SWCLK: ST_LINK/V2.9 STM32F3.49 | length 12.4
  Top Layer w0.254: STM32F3.49 49.303,83.118 50.125,82.296 51.113,82.296 54.098,85.281 57.468,85.281 ST_LINK/V2.9
SWDIO: ST_LINK/V2.7 STM32F3.46 | length 15.6
  Top Layer w0.254: STM32F3.46 45.516,81.141 45.516,81.995 46.02,82.499 49.28,82.499 49.937,81.842 51.377,81.842 52.276,82.741 57.468,82.741 ST_LINK/V2.7
TTN_CLK: "Probe Points.4" STM32F3.58 T1.25 | length 76.6
  Top Layer w0.254: 32.385,72.009 32.385,70.612 34.036,68.961 44.5,68.961 46.99,66.471 46.99,52.07 49.657,49.403 55.148,49.403 59.277,53.532 60.442,53.532 T1.25 ; v2@40.144,87.618 STM32F3.58 STM32F3.58@48.516,87.595
  Bottom Layer w0.254: 32.385,72.009 32.385,73.152 34.33,75.097 34.33,79.408 38.427,83.505 38.427,87.068 38.989,87.63 40.005,87.63 v2@40.132,87.503
  other v2: 40.132,87.63
TTN_PWM: "Probe Points.3" STM32F3.59 T1.21 | length 83.8
  Top Layer w0.254: STM32F3.59@48.516,88.095 STM32F3.59 42.083,88.118 41.25,88.951 39.993,88.951 39.141,88.099 39.141,82.989 37.724,81.572 34.925,81.572 33.68,80.327 33.68,74.953 33.01,74.283 32.119,74.283 29.845,72.009 29.845,69.977 31.75,68.072 44.069,68.072 45.819,66.322 45.819,51.717 48.895,48.641 55.906,48.641 59.234,51.969 60.479,51.969 T1.21
TTN_ready: "Probe Points.2" STM32F3.41 T1.17 | length 106.9
  Top Layer w0.254: 27.305,72.009 27.305,70.104 30.353,67.056 43.566,67.056 44.831,65.791 44.831,51.435 48.387,47.879 57.346,47.879 59.304,49.837 ; STM32F3.41 v2(42.993,83.212) ; 59.304,49.894 59.304,49.837 ; T1.17 59.972,50.505 59.304,49.837 ; v2(60.833,48.26) 59.819,48.26 59.304,48.775 59.304,49.837
  Bottom Layer w0.254: v2(42.993,83.212) 46.201,83.212 55.753,73.66 60.325,73.66 62.161,71.824 62.161,49.588 v2(60.833,48.26)
UART_RX: RN41.14 STM32F3.52 UART1.2 | length 68.4
  Top Layer w0.254: v2(21.082,106.553) 21.082,104.394 UART1.2 21.209,100.452 21.753,99.907 21.753,96.035 RN41.14@22.033,95.756 ; STM32F3.52 v2(51.804,84.618)
  Bottom Layer w0.254: v2(21.082,106.553) 22.098,105.537 41.483,105.537 42.753,106.807 49.517,106.807 53.467,102.857 53.467,87.217 51.884,85.634 51.884,84.698 v2(51.804,84.618)
UART_TX: RN41.13 STM32F3.51 UART1.1 | length 68.9
  Top Layer w0.254: RN41.13@23.226,95.756 23.506,96.035 23.506,100.912 23.241,101.177 23.241,103.759 UART1.1 v2(23.749,106.553) ; STM32F3.51 48.502,84.109 49.749,84.109 v2(50.546,83.312)
  Bottom Layer w0.254: v2(23.749,106.553) 24.892,107.696 50.038,107.696 54.356,103.378 54.356,85.733 51.935,83.312 v2(50.546,83.312)
USART_RX: STM32F3.17 UART.4 | length 8.4
  Top Layer w0.254: UART.4 32.428,91.737 36.152,91.737 36.83,91.059 36.83,90.641 36.853,90.618 STM32F3.17
USART_TX: STM32F3.16 UART.5 | length 9
  Top Layer w0.254: UART.5 30.769,92.618 STM32F3.16
USB_DM: MicroUSB.2 R27.1 | length 78.3
  Top Layer w0.254: v2(46.333,74.525) 46.333,74.577 47.321,75.565 R27.1 ; v2(55.584,10.354) 55.584,9.522 56.261,8.845 56.261,7.034 56.961,6.334 58.466,6.334 MicroUSB.2
  Bottom Layer w0.254: v2(46.333,74.525) 47.437,74.525 49.53,72.431 49.53,67.437 47.117,65.024 47.117,29.591 49.403,27.305 49.403,17.437 55.584,11.256 v2(55.584,10.354)
USB_DP: MicroUSB.3 R26.1 R28.1 | length 84.4
  Top Layer w0.254: R28.1 50.038,74.295 v2(51.181,74.295) ; R26.1@54.132,10.914 54.082,10.914 53.759,10.591 R26.1 53.759,10.491 55.655,8.595 v2(55.655,6.461) 56.505,5.611 MicroUSB.3
  Bottom Layer w0.254: v2(51.181,74.295) 51.181,67.131 53.34,64.972 53.34,30.087 50.673,27.42 50.673,18.063 56.769,11.967 56.769,9.038 55.655,7.924 v2(55.655,6.461)
VBAT: C11.2 L1.1 Q1.2 R4.2 SW-PWR.3 TPS.6 TPS.9 | length 41.7
  Top Layer w0.4: C11.2@15.378,17.93 16.393,18.945 16.432,18.945 ; 16.596,19.109 TPS.6 ; TPS.9 17.896,27.12 Q1.2@19.044,28.268
  Top Layer w0.41: 16.432,18.945 16.596,19.109
  Top Layer w0.8: R4.2 15.378,15.797 15.378,15.509 16.052,14.835 18.069,14.835 20.154,16.92 20.154,27.813 Q1.2
  Top Layer w1: L1.1 6.592,19.503 10.16,15.935 ; SW-PWR.3 13.484,13.311 12.784,13.311 10.16,15.935 ; C11.2@15.378,17.93 C11.2 15.378,16.207 R4.2 10.227,16.002 10.16,15.935
Vcharge: T1.7 TLC1.6 TLC1.7 | length 32.7
  Top Layer w0.254: TLC1.7 40.005,26.85 43.434,30.279 43.434,32.131 50.6,39.297 53.937,39.297 57.945,43.305 T1.7
  Top Layer w0.6: TLC1.6 TLC1.7
Vcharge_in: R12.2 R13.1 TLC1.5 | length 6.1
  Top Layer w0.254: TLC1.5 37.465,21.916 37.508,21.916 39.193,20.231 R13.1 R12.2
VDAC_electrode_in: STM32F3.20 TLC1.12 | length 102.6
  Top Layer w0.254: v2(27.559,31.75) 27.559,33.125 28.34,33.906 32.822,33.906 33.739,32.989 33.739,32.462 34.86,31.341 34.86,28.942 TLC1.12 ; v2(33.421,87.252) 34.273,87.252 36.116,89.095 36.97,89.095 STM32F3.20
  Bottom Layer w0.254: v2(27.559,31.75) 32.184,36.375 40.058,36.375 43.942,40.259 43.942,65.278 42.672,66.548 29.845,66.548 26.174,70.219 26.174,79.902 29.596,83.324 30.694,83.324 33.421,86.051 v2(33.421,87.252)
VDAC_peltier_in: STM32F3.21 TCA1.9 | length 43.7
  Top Layer w0.254: TCA1.9 15.835,70.612 16.47,69.977 v2(16.637,69.977) ; v2(35.189,85.925) 35.189,87.526 36.258,88.595 36.97,88.595 STM32F3.21
  Bottom Layer w0.254: v2(16.637,69.977) 16.637,80.01 27.293,90.666 32.651,90.666 35.189,88.128 v2(35.189,85.925)
VDAC_TTN: T1.13 TLC1.1 TLC1.2 | length 60.9
  Top Layer w0.254: TLC1.1 32.385,23.077 30.811,21.503 30.811,17.449 32.131,16.129 40.079,16.129 45.593,21.643 v2(45.593,31.75) ; v2(45.466,38.1) 45.466,38.158 47.821,40.513 53.524,40.513 58.716,45.705 T1.13
  Top Layer w0.6: TLC1.1 TLC1.2
  Bottom Layer w0.254: v2(45.466,38.1) 45.529,38.036 45.529,31.813 v2(45.593,31.75)
VDAC_TTN_in: R10.2 R11.1 TLC1.3 | length 5.9
  Top Layer w0.254: R10.2 33.324,20.231 33.647,20.554 33.647,20.604 34.925,21.882 TLC1.3
VLiPo: C10.2 JSTPH.1 MCP.3 SW-PWR.2 | length 48.1
  Top Layer w1: JSTPH.1 11.794,6.461 SW-PWR.2 18.414,9.373 19.97,7.817 45.533,7.817 46.393,8.677 C10.2 46.393,9.357 45.813,9.937 MCP.3@45.813,10.838
Vpeltier: Peltier.1 TCA1.10 TCA1.16 | length 14.6
  Top Layer w0.5: TCA1.16 12.806,79.502 11.811,78.507 11.811,72.877 12.806,71.882 TCA1.10 18.288,71.882 Peltier.1
VREF_electrode: "Probe Points.10" AD8.3 R33.1 T1.51 | length 61.5
  Top Layer w0.254: AD8.3 26.611,77.312 28.76,77.312 R33.1 29.133,77.635 29.762,78.264 29.762,78.53 v2(30.48,79.248) ; 47.625,72.009 v2(52.07,72.009) 53.594,72.009 57.785,67.818 57.785,65.416 59.096,64.105 T1.51
  Bottom Layer w0.254: v2(30.48,79.248) 31.623,78.105 31.623,74.549 31.115,74.041 31.115,70.358 32.004,69.469 32.766,69.469 33.794,70.497 33.794,73.164 37.211,76.581 50.419,76.581 52.07,74.93 v2(52.07,72.009)
VREF_electrode_out: AD8.2 R14.1 R33.2 TLC1.14 | length 79.6
  Top Layer w0.254: AD8.2 27.873,76.637 28.152,76.358 28.76,76.358 R33.2 29.133,76.035 30.441,77.343 v2(30.669,77.343) ; v2(30.811,29.21) 31.144,28.877 TLC1.14 R14.1
  Bottom Layer w0.254: v2(30.669,77.343) 30.669,74.992 28.436,72.759 28.436,71.541 31.778,68.199 42.849,68.199 45.339,65.709 45.339,40.259 40.072,34.992 36.593,34.992 v2(30.811,29.21)
Vtemp: T1.9 TLC1.8 TLC1.9 | length 28.7
  Top Layer w0.254: TLC1.8 40.005,29.777 49.979,39.751 53.636,39.751 57.99,44.105 T1.9
  Top Layer w0.6: TLC1.9 TLC1.8
Vtemp_in: R8.2 R9.1 TLC1.10 | length 4.2
  Top Layer w0.254: TLC1.10 37.465,31.331 R9.1 R8.2
pads on no net: DS7.3 JSTPH.MP1 JSTPH.MP2 LM2.2 MicroUSB.4 MicroUSB.6 MicroUSB.7 MicroUSB.8 MicroUSB.9 MicroUSB.10 MicroUSB.11 RESET.2 RESET.4 RN41.2 RN41.3 RN41.4 RN41.5 RN41.6 RN41.7 RN41.8 RN41.9 RN41.10 RN41.15 RN41.16 RN41.17 RN41.18 RN41.20 RN41.23 RN41.24 RN41.30 RN41.31 RN41.32 RN41.33 RN41.34 RN41.35 STM32F3.2 STM32F3.3 STM32F3.4 STM32F3.8 STM32F3.9 STM32F3.10 STM32F3.11 STM32F3.15 STM32F3.22 STM32F3.23 STM32F3.24 STM32F3.25 STM32F3.26 STM32F3.27 STM32F3.28 STM32F3.29 STM32F3.30 STM32F3.37 STM32F3.38 STM32F3.42 STM32F3.43 STM32F3.50 STM32F3.53 STM32F3.54 STM32F3.55 STM32F3.56 STM32F3.57 SW-PWR.1 T1.2 T1.4 T1.5 T1.6 T1.8 T1.10 T1.11 T1.12 T1.14 T1.16 T1.18 T1.19 T1.20 T1.22 T1.23 T1.24 T1.26 T1.27 T1.28 T1.30 T1.31 T1.32 T1.34 T1.35 T1.36 T1.38 T1.39 T1.40 T1.42 T1.43 T1.44 T1.46 T1.47 T1.48 T1.50 T1.52 T1.MH1 T1.MH2 T1.MP1C T1.MP2C T2.MH3 T2.MH4 T2.MP1L T2.MP2L T2.MP3L T2.MP4L TCA1.2 TCA1.3 TCA1.6 TCA1.11 TCA1.14 TCA1.15 TPS.12 TPS.16 UART.2 UART.6

## Polygon pours and split planes (outlines as drawn)
GND on Bottom Layer "Bottom Layer-GND 4" (solid, pour order 72): 0,108.458 0,96.774 27.139,96.774 27.139,108.546 27.178,108.585
GND on Bottom Layer "Bottom Layer-GND 2" (solid, remove dead copper, pour order 70): 27.178,73.279 62.738,73.279 62.738,108.585 27.178,108.585
GND on Bottom Layer "Bottom Layer-GND 1" (solid, remove dead copper, pour order 93): 0,40.386 0,0 13.081,0 13.081,6.858 47.223,6.858 52.176,6.858 54.61,5.08 54.61,0 62.738,0 62.738,48.514 43.177,48.514 43.177,40.386
GND on Bottom Layer "Bottom Layer-GND 3" (solid, remove dead copper, pour order 68): 18.923,81.534 28.829,81.534 28.829,64.979 28.784,65.024 18.923,65.024
GND on Bottom Layer "Bottom Layer-GND" (solid, remove dead copper, pour order 52): 0,40.259 18.923,40.259 18.923,81.534 0.127,81.534 0,81.661
no net on Bottom Layer "Bottom Layer-No Net" (solid, pour order 66): 18.923,81.534 28.829,81.534
no net on Bottom Layer "Bottom Layer-No Net 1" (solid, pour order 54): 18.923,81.534
no net on Bottom Layer "Bottom Layer-No Net 2" (solid, pour order 0): -30.861,61.214
GND on Top Layer "Top Layer-GND 7" (solid, remove dead copper, pour order 36): 11.43,26.107 18.247,26.107 18.247,21.631 19.558,20.32 19.558,17.145 17.907,17.145 17.649,17.403 17.649,21.572 16.265,21.572 16.265,19.351 15.583,18.669 14.317,18.669 14.317,16.801 14.28,16.764 10.477,16.764 9.274,17.967 9.274,18.481 11.43,18.481 11.43,25.237
GND on Top Layer "Top Layer-GND 5" (solid, remove dead copper, pour order 34): 11.303,35.179 24.638,35.179 24.638,28.067 24.765,27.94 24.666,27.841 14.803,27.841 14.803,29.737 11.303,31.711
GND on Top Layer "Top Layer-GND 1" (solid, remove dead copper, pour order 81): 39.243,108.585 39.243,103.957 62.682,103.957 62.738,104.013 62.738,108.585
GND on Top Layer "Top Layer-GND 2" (solid, remove dead copper, pour order 77): 27.559,108.585 39.243,108.585 39.243,98.298 38.735,98.806 27.559,98.806
GND on Top Layer "Top Layer-GND" (solid, remove dead copper, pour order 89): 19.812,73.533 19.812,70.739 19.885,70.812 23.136,70.812 23.114,70.834 23.114,78.613 25.654,78.613 25.654,77.635 27.981,77.635 28.702,78.356 28.702,80.121 22.902,80.121 21.743,81.28 16.312,81.28 12.319,77.287 12.319,73.533
GND on Top Layer "Top Layer-GND 3" (solid, remove dead copper, pour order 14): 9.398,95.758 9.398,82.446 28.255,82.446 28.321,82.512 28.321,95.756
GND on Top Layer "Top Layer-GND 6" (solid, remove dead copper, pour order 28): 62.738,17.018 46.825,17.018 46.609,17.234 46.609,47.371 62.738,47.371
GND on Top Layer "Top Layer-GND 4" (solid, remove dead copper, pour order 38): 0.635,77.597 4.318,77.597 4.318,69.215 0.635,69.215